# Altium PCB driver_display.PcbDoc
Units mm, origin at the board's own origin, x right, y up, seen from the top; angles counter-clockwise.
Board outline 116 x 42 mm, 2 copper layers (Top Layer, Bottom Layer); 52 components, 65 nets, 197 pads, 48 vias.
Unrouted connection lines stored in the file: 1.
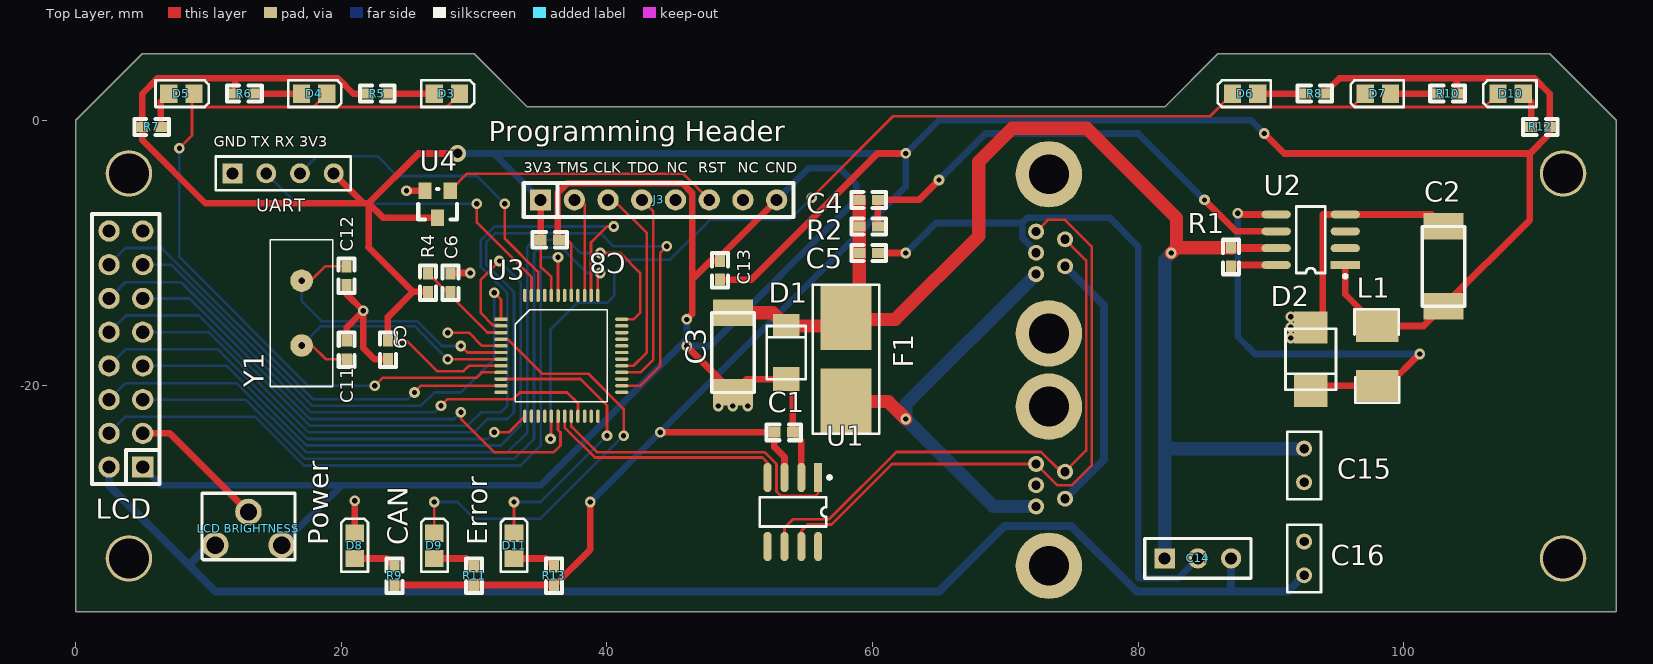
[diagram p0: Top Layer view]
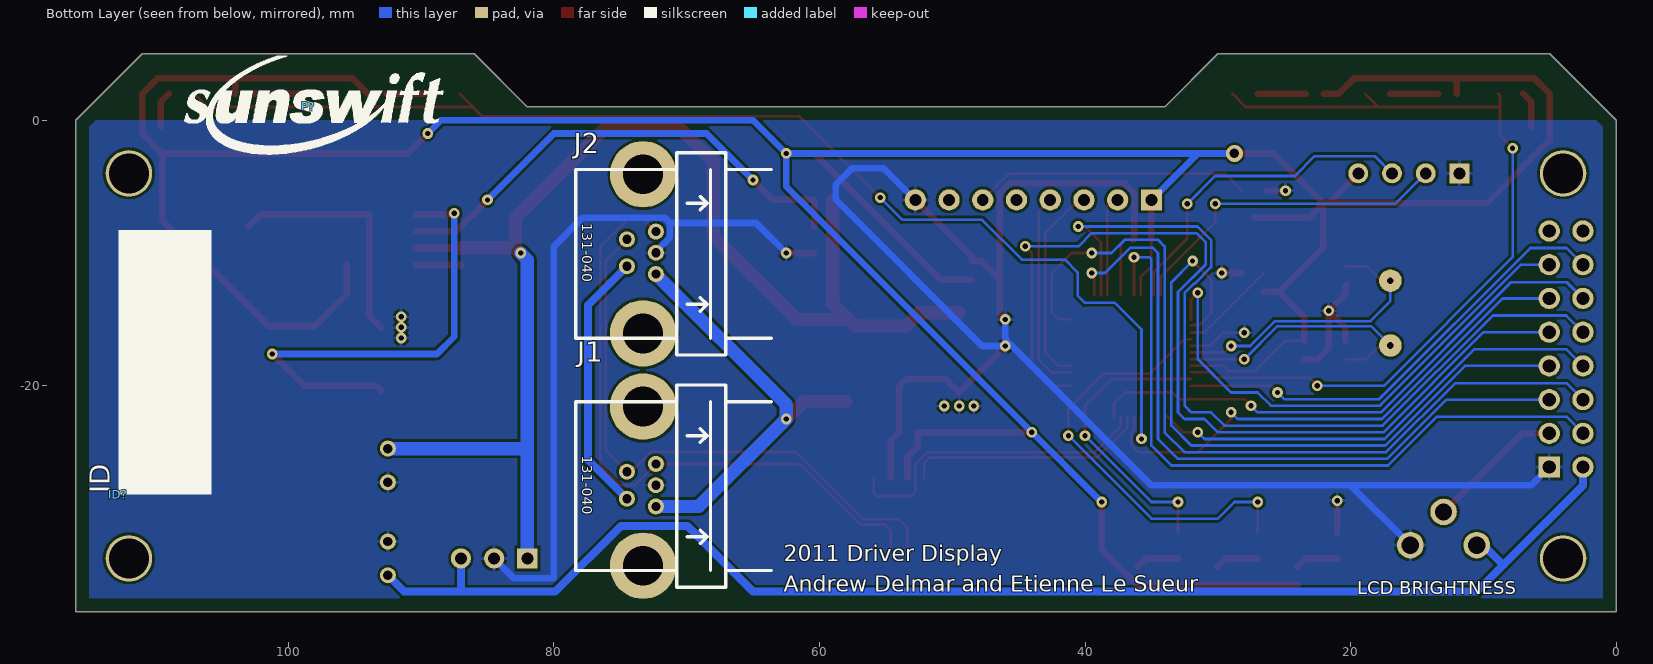
[diagram p1: Bottom Layer view, seen from below]

## Layer stack, top to bottom
Top Layer: signal copper 0.0356
Dielectric: dielectric 0.32, FR-4, Dk 4.8
Bottom Layer: signal copper 0.0356

## Board outline
0,-37 0,0 5,5 30,5 34,1 82,1 86,5 111,5 116,0 116,-37

## Design rules (kind name [scope] priority, off if disabled: settings)
Clearance [All] p1: gap=0.2
PolygonConnect [All] p1: connectstyle=Relief reliefconductorwidth=0.254 reliefentries=4 polygonreliefangle="90 Angle"
RoutingVias [All] p1: holewidth=0.4 width=0.8 viastyle="Through Hole" minholewidth=0.4 minwidth=0.8 maxholewidth=0.4 maxwidth=0.8
SilkscreenOverComponentPads [All] p1: minsilkscreentomaskgap=0.254
SolderMaskExpansion [All] p1: expansion=0.102
Width Width_GND [(InNet('CANGND') OR InNet('GND'))] p1: maxlimit=2 minlimit=0.5 preferedwidth=1 minimp=50.000000 maximp=50.000000 favimp=50.000000
Width Width_5V [(InNet('5V') OR InNet('CAN+5V'))] p2: maxlimit=1 minlimit=0.6 preferedwidth=0.8 minimp=50.000000 maximp=50.000000 favimp=50.000000
Width Width_12V [(InNet('12V') OR InNet('NetF1_1'))] p3: maxlimit=2 minlimit=1 preferedwidth=1 minimp=50.000000 maximp=50.000000 favimp=50.000000
Width Width_3V3 [InNet('3V3')] p4: maxlimit=1 minlimit=0.5 preferedwidth=0.8 minimp=50.000000 maximp=50.000000 favimp=50.000000
Width [All] p5: maxlimit=1 minlimit=0.2 preferedwidth=0.2 minimp=50.000000 maximp=50.000000 favimp=50.000000
27 further rules are at their usual default settings.

## Classes and differential pairs
component class U_3V-Switcher-50mA: C2 C3 C4 C5 D2 L1 R1 R2 U2
component class driver_display: C14 C15 C16 D3 D4 D5 D6 D7 D8 D9 D10 D11 "GND TX RX 3V3" ID? P? R5 R6 R7 R8 R9 R10 R11 R12 R13
component class PWR: C1 D1 F1 "GND TX RX 3V3" J1 U1
component class LPC: C6 C8 C9 C11 C12 C13 J3 R4 U3 U4 U8 Y1
component class LCD: LCD "LCD BRIGHTNESS"

## Components (designator, comment, footprint, x,y, rotation, side; value= is the part's Value field where it differs from the comment)
C1 "100nF" 0603 54,-23.5 r180 top
C2 "4u7 35V" MCCT-CASEC 103,-14 r90 top
C3 "4u7 35V" MCCT-CASEC 49.5,-14.5 r270 top
C4 "1n" 0603 59,-6 r0 top
C5 "100nF" 0603 59,-10 r0 top
C6 "10nF" 0603 28.225,-12.925 r90 top
C8 "100nF" 0603 36.397,-9 r180 top
C9 "100nF" 0603 23.5,-16.6 r270 top
C11 "18pF" 0603 20.4,-18 r90 top
C12 "18pF" 0603 20.375,-11 r270 top
C13 "100nF" 0603 48.5,-12 r90 top
C14 "MC78M05CT" 7805 82,-33 r0 top
C15 "100u" RAD-0.1 92.5,-26 r270 top
C16 "100u" RAD-0.1 92.5,-33 r90 top
D1 "12V Transient Suppressor" SMA 53.5,-17.5 r90 top
D2 "MBRS130" SMB 93,-18 r270 top
D3 "Left Turn LED1" 0805LED12 27,2 r0 top
D4 "Left Turn LED2" 0805LED12 17,2 r0 top
D5 "Left Turn LED3" 0805LED12 7,2 r0 top
D6 "Right Turn LED1" 0805LED12 89,2 r180 top
D7 "Right Turn LED2" 0805LED12 99,2 r180 top
D8 "Power" 0805LED12 21,-33 r90 top
D9 "CAN" 0805LED12 27,-33 r90 top
D10 "Right Turn LED3" 0805LED12 109,2 r180 top
D11 "Error" 0805LED12 33,-33 r90 top
F1 "125mA/3A" LITTELFUSE-154 58,-18 r90 top
"GND TX RX 3V3" "Header 4" HDR1X4 11.8,-4 r0 top (schematic designator J2)
ID? "IDBOX" IDBOX 112.8,-28.2 r90 bottom
J1 "CON5-S" TRIAD5F 74.5,-28.5 r270 bottom
J2 "CON5-S" TRIAD5F 74.5,-11 r270 bottom
J3 "Programming Header" IDC8 35,-6 r0 top
L1 "330uH" 1812 98,-20 r90 top
LCD "LCD" IDC16 5.04,-26.12 r90 top
"LCD BRIGHTNESS" "RPot" trimpot 10.5,-32 r0 top (schematic designator R3)
P? "SUN_LOGO" SUNSWIFTLOGO 98.5,1 r180 bottom
R1 "100k" 0603 87,-11 r90 top
R2 "1R2" 0603 59,-8 r0 top
R4 "10k" 0603 26.525,-11.525 r270 top
R5 "Left Turn 1" 0603 22,2 r0 top
R6 "Left Turn 2" 0603 12,2 r0 top
R7 "Left Turn 3" 0603 5,-0.5 r0 top
R8 "Res3" 0603 94,2 r180 top
R9 "Res3" 0603 24,-35 r90 top
R10 "Res3" 0603 104,2 r180 top
R11 "Res3" 0603 30,-35 r90 top
R12 "Res3" 0603 111,-0.5 r180 top
R13 "Res3" 0603 36,-35 r90 top
U1 "SN65HVD232" SO8 54,-29.5 r180 top
U2 "LTC1474" SO8 93,-9 r90 top
U3 "LPC11C14" QFP48 32,-15 r0 top
U4 "XC61CN2002MR" SOT23-3 28.2,-5.3 r180 top
Y1 "12 MHz" HC49/4H 17,-9 r270 top

## Footprints (in the part's own frame and the unit in brackets; to place one, negate y for a bottom-side part, rotate by r counter-clockwise, add the part's x,y. Pads: shape width x height; smd on the part's side, far side on the other; paste and mask are expansions set on the pad)
0603 [mil]
  rect 35.43x30 smd: 1(0,0) 2(55,0)
  silkscreen extent -24,-24 79,24
0805LED12 [mm]
  rect 1.3x1.4 smd: 1(0,0) 2(1.9,0)
  silkscreen extent -1,-1 3,1
1812 [mm]
  rect 2.4x3.2 smd: 1(0,0) 2(4.5,0)
  silkscreen extent -1.27,-1.66 5.77,1.7
7805 [mil]
  rect 60x60 hole 35.43: 1(0,0)
  round 60 hole 35.43: 2(98.43,0) 3(196.85,0)
  silkscreen extent -59,-59 256,59
HC49/4H [mm]
  round 1.7 hole 0.5: 1(3.085,0) 2(7.965,0)
  silkscreen extent 0,-2.35 11.05,2.35
HDR1X4 [mm] "Connector; Header; 4 Position"
  rect 1.5x1.5 hole 0.9: 1(0,0)
  round 1.5 hole 0.9: 2(2.54,0) 3(5.08,0) 4(7.62,0)
  silkscreen extent -1.27,-1.27 8.89,1.27
IDBOX [mm] "Infobox"
  silkscreen extent 0,-7 19.95,0
IDC8 [mm]
  rect 1.6x1.6 hole 0.9: 1(0,0)
  round 1.6 hole 0.9: 2(2.54,0) 3(5.08,0) 4(7.62,0) 5(10.16,0) 6(12.7,0) 7(15.24,0) 8(17.78,0)
  silkscreen extent -1.27,-1.27 19.05,1.27
IDC16 [mm]
  rect 1.6x1.6 hole 1: 1(0,0)
  round 1.6 hole 1: 2(0,2.54) 3(2.54,0) 4(2.54,2.54) 5(5.08,0) 6(5.08,2.54) 7(7.62,0) 8(7.62,2.54) 9(10.16,0) 10(10.16,2.54) 11(12.7,0) 12(12.7,2.54) 13(15.24,0) 14(15.24,2.54) 15(17.78,0) 16(17.78,2.54)
  silkscreen extent -1.27,-1.27 19.05,3.81
LITTELFUSE-154 [mm]
  rect 5x3.81 smd: 1(-3.185,0) 2(3.185,0)
  silkscreen extent -5.6,-2.51 5.6,2.5
MCCT-CASEC [mm]
  rect 2x3 smd: 1(0,0) 2(6,0)
  silkscreen extent 0,-1.6 6,1.6
QFP48 [mm]
  rect 1x0.26 smd: 1(0.013,0.01)
  oval 1x0.26 smd: 2(0.013,-0.49) 3(0.013,-0.99) 4(0.013,-1.49) 5(0.013,-1.99) 6(0.013,-2.49) 7(0.013,-2.99) 8(0.013,-3.49) 9(0.013,-3.99) 10(0.013,-4.49) 11(0.013,-4.99) 12(0.013,-5.49) 25(9.113,-5.49) 26(9.113,-4.99) 27(9.113,-4.49) 28(9.113,-3.99) 29(9.113,-3.49) 30(9.113,-2.99) 31(9.113,-2.49) 32(9.113,-1.99) 33(9.113,-1.49) 34(9.113,-0.99) 35(9.113,-0.49) 36(9.113,0.01)
  oval 0.26x1 smd: 13(1.813,-7.29) 14(2.313,-7.29) 15(2.813,-7.29) 16(3.313,-7.29) 17(3.813,-7.29) 18(4.313,-7.29) 19(4.813,-7.29) 20(5.313,-7.29) 21(5.813,-7.29) 22(6.313,-7.29) 23(6.813,-7.29) 24(7.313,-7.29) 37(7.313,1.81) 38(6.813,1.81) 39(6.313,1.81) 40(5.813,1.81) 41(5.313,1.81) 42(4.813,1.81) 43(4.313,1.81) 44(3.813,1.81) 45(3.313,1.81) 46(2.813,1.81) 47(2.313,1.81) 48(1.813,1.81)
  silkscreen extent 1.1,-6.2 8.03,0.73
RAD-0.1 [mm] "Radial Cap, Thru-Hole; 2 Leads; 0.1 in Pin Spacing"
  round 1.2 hole 0.7: 1(-1.27,0) 2(1.27,0)
  silkscreen extent -2.54,-1.27 2.54,1.27
SMA [mm]
  rect 1.8x2 smd: A(-2,0) K(2,0)
  silkscreen extent -2,-1.48 2,1.48
SMB [mm]
  rect 2.4x2.5 smd: A(-2.385,0) K(2.385,0)
  silkscreen extent -2.28,-1.9 2.3,1.9
SO8 [mm]
  rect 0.6x2.2 smd: 1(-1.905,-2.6)
  oval 0.6x2.2 smd: 2(-0.635,-2.6) 3(0.635,-2.6) 4(1.905,-2.6) 5(1.905,2.6) 6(0.635,2.6) 7(-0.635,2.6) 8(-1.905,2.6)
  silkscreen extent -2.88,-2.72 2.5,1.1
SOT23-3 [mm]
  rect 1x1.25 smd: 1(0,0) 2(1.905,0) 3(0.965,2.032)
  silkscreen extent -0.51,-0.13 2.41,2.16
SUNSWIFTLOGO [mm] "Sunswift Logo"
  silkscreen extent -9.32,-3.58 10.19,3.81
TRIAD5F [mm]
  round 5 hole 3: 0(-6.934,1.219) 0(5.055,1.219)
  round 1.2 hole 0.7: 1(0,0) 2(0.584,2.184) 3(-1.016,2.184) 4(-2.616,2.184) 5(-2.032,0)
  silkscreen extent -8.56,-3.86 6.68,10.87
trimpot [mm]
  round 2 hole 1.3: 1(0,0) 2(5,0) 3(2.5,2.5)
  silkscreen extent -1,-1.1 6,3.9

## Part data
C1 C4 C5 C6 C8 C9 C11 C12 C13: library part CAP, "Capacitor"
C2 C3: library part "Cap Pol3", "Polarized Capacitor (Surface Mount)"
C14: "3-Terminal Medium-Current Positive Fixed Voltage Regulator"
C15 C16: library part CAP-POL, "Capacitor"
D1: library part DIODE, "Diode"
D2: library part "D SCHOTTKY", "Schottky Diode"
D3 D4 D5 D6 D7 D8 D9 D10 D11: library part LED2, "Typical RED, GREEN, YELLOW, AMBER GaAs LED"
F1: library part FUSE2, "Fuse"
"GND TX RX 3V3": "Header, 4-Pin"
J1 J2: "Connector, 2 pin, with shield @ S"
J3: library part LPCLink_Connector, "LPC SWD Connector"
L1: library part Inductor, "Inductor"
"LCD BRIGHTNESS": "Potentiometer"
R1 R2 R4: library part RES1, "Resistor"
R5 R6 R7: library part Res3, "Resistor"
R8 R9 R10 R11 R12 R13: "Resistor"
U1: "3.3V CAN Transciever"
U2: "Step-down converter"
U3: library part LPC11C14_Full
U4: library part XC61F, "SOT23 reset generator"
Y1: library part CRYSTAL, "Crystal"

## Free pads (board coordinates)
  round 3.5 hole 3: 3(4,-33) 3(4,-4) 3(112,-33) 3(112,-4)

## Via types
v1: diameter 0.8, hole 0.4, Top Layer to Bottom Layer, 47 vias
v2: diameter 1.27, hole 0.711, Top Layer to Bottom Layer, 1 vias

## Nets (pads, with @x,y where several pads share a name; then routed paths per layer and width w, separated by ;. In a path a pad name is that pad's centre, name@x,y a point inside that pad or via, vN(x,y) a via of type N, cw(c..) or ccw(c..) an arc to the next point about the centre after c; other vN are vias at no path point)
3V3: "GND TX RX 3V3.4" C1.2 C2.1 C8.2 C9.1 C13.1 J3.1 L1.2 R4.2 R5.1 R6.1 R7.1 R8.1 R9.1 R10.1 R11.1 R12.1 R13.1 U1.3 U2.1 U3.8 U3.44 U4.3 | length 312.7
  Top Layer w0.2: C9.1 24.9,-16.6 27.2,-18.9 29.2,-18.9 29.61,-18.49 U3.8 ; C8.2 35,-11 35.813,-11.813 U3.44
  Top Layer w0.5: R6.1 12,3.15 ; 19.42,-4 21.67,-6.25 ; R5.1 20.886,2 19.736,3.15 12,3.15 ; C9.1 23.5,-14.822 25.4,-12.922 ; R9.1 R11.1 R13.1 36.07,-35 38.75,-32.32 v1(38.75,-28.75) ; R4.2 25.4,-12.922 ; U4.3 23.132,-7.332 22.05,-6.25 ; v2(28.75,-2.5) 25.8,-2.5 22.05,-6.25 ; C8.2 J3.1 ; v1(44,-23.5) C1.2 52.603,-24.603 53.365,-25.365 U1.3 ; C13.1 50.875,-12 60.375,-2.5 v1(62.5,-2.5) ; v1(89.5,-1) 91,-2.5 109.5,-2.5 ; R8.1 95.15,3.15 104,3.15 ; U2.1 95.6,-13.1 L1.2 101.5,-15.5 C2.1 109.5,-7.5 109.5,-2.5 ; R10.1 104,3.15 ; 12,3.15 6.15,3.15 5,2 R7.1 5,-1.5 9.75,-6.25 21.67,-6.25 ; 21.67,-6.25 22.05,-6.25 ; 22.05,-6.25 22.05,-9.55 22.039,-9.561 25.4,-12.922 ; 104,3.15 109.85,3.15 111,2 R12.1 111,-1 109.5,-2.5
  Bottom Layer w0.5: v2(28.75,-2.5) 31.5,-2.5 ; J3.1 31.5,-2.5 ; v1(38.75,-28.75) v1(44,-23.5) 62.5,-5 v1(62.5,-2.5) ; v1(89.5,-1) 88.5,0 65,0 v1(62.5,-2.5) ; 31.5,-2.5 v1(62.5,-2.5)
5V: "LCD BRIGHTNESS.1" C14.3 C16.1 LCD.2 | length 104.4
  Bottom Layer w0.6: LCD.2 2.5,-27.5 8.5,-33.5 ; 10.5,-32 10,-32 8.5,-33.5 ; C14.3 87,-35.5 ; C16.1 91.27,-35.5 87,-35.5 ; 8.5,-33.5 10.5,-35.5 65,-35.5 69.945,-30.555 74.955,-30.555 79.9,-35.5 87,-35.5
12V: C3.1 C4.1 C5.1 C14.1 C15.1 D1.K F1.2 R1.2 R2.1 U2.7 | length 99.5
  Top Layer w0.6: R1.2@87.032,-9.635 U2.7
  Top Layer w1: C3.1 52.5,-14.5 D1.K 57.315,-15.5 F1.2 ; C4.1 R2.1 C5.1 59,-13.815 F1.2 ; v1(82.5,-10) 82.897,-9.603 ; R1.2@87.032,-9.635 R1.2 82.897,-9.603 ; F1.2 58.185,-15 61.725,-15 68,-8.725 68,-3.125 70.525,-0.6 76.125,-0.6 82.897,-7.372 82.897,-9.603
  Bottom Layer w1: C14.1 82,-24.73 ; v1(82.5,-10) 82,-10.5 82,-24.73 ; C15.1 82,-24.73
/RESET: C6.1 J3.6 R4.1 U3.3 U4.1 | length 28.2
  Top Layer w0.2: R4.1@26.55,-11.55 30.99,-15.99 U3.3 ; U4.1 29.475,-4.025 45.725,-4.025 45.9,-4.2 45.906,-4.2 46.96,-5.254 46.96,-5.26 J3.6
CAN+5V: J1.1 J2.1 | length 19.9
  Bottom Layer w0.6: J1.1 77.425,-25.575 77.425,-13.925 J2.1
CAN_H: J1.4 J2.4 U1.7 | length 48.3
  Top Layer w0.2: U1.7 54.635,-30.915 55.1,-30.45 56.893,-30.45 61.46,-25.884 J1.4 73.932,-27.5 75,-27.5 76.5,-26 76.5,-9.5 74.5,-7.5 73.199,-7.5 J2.4
CAN_L: J1.5 J2.5 U1.6 | length 44.3
  Top Layer w0.2: U1.6 53.365,-30.685 54,-30.05 56.728,-30.05 61.794,-24.984 72.688,-24.984 74.173,-26.468 J1.5 76.081,-24.887 76.081,-10.549 J2.5
CANLED: D9.2 U3.4 | length 33.1
  Top Layer w0.2: D9.2 v1(27,-28.75) ; U3.4 32.491,-16.49 35.091,-19.09 38.59,-19.09 41.25,-21.75 v1(41.25,-23.75)
  Bottom Layer w0.2: v1(27,-28.75) 28.75,-28.75 30,-30 35,-30 v1(41.25,-23.75)
ERRORLED: D11.2 U3.10 | length 22.5
  Top Layer w0.2: U3.10 37.99,-19.49 40,-21.5 v1(40,-23.75) ; D11.2 v1(33,-28.75)
  Bottom Layer w0.2: v1(33,-28.75) 35,-28.75 v1(40,-23.75)
GND: "GND TX RX 3V3.1" "LCD BRIGHTNESS.2" C1.1 C2.2 C3.2 C5.2 C6.2 C8.1 C9.2 C11.2 C12.2 C13.2 C14.2 C15.2 C16.2 D1.A D2.A D8.2 J1.3 J2.3 J3.8 LCD.1 U1.2 U2.4 U3.5 U3.41 U4.2 | length 227.9
  Top Layer w0.2: v1(28,-16) 29.6,-16 30.59,-16.99 U3.5 ; C8.1 37,-9 37.313,-9.313 U3.41
  Top Layer w0.5: C12.2 20.375,-13.075 v1(21.65,-14.35) ; C11.2 20.4,-15.6 v1(21.65,-14.35) ; D8.2 v1(21,-28.65) ; C9.2 22.497,-17.997 21.65,-17.15 v1(21.65,-14.35) ; v1(24.9,-5.3) U4.2 ; C6.2 28.253,-11.5 v1(29.7,-11.5) ; C8.1 36.29,-8.893 36.29,-5.482 37.022,-4.75 45.678,-4.75 46.41,-5.482 46.41,-12 ; v1(46,-17) C3.2 50.5,-19.5 D1.A 54,-20 C1.1 54.635,-24.135 U1.2 ; v1(46,-15) 46.41,-14.59 46.41,-12 ; J3.8 48.5,-10.28 C13.2 47.807,-10.603 46.41,-12 ; C5.2 v1(62.5,-10) ; D2.A 93.905,-14.71 93.905,-7.095 U2.4 102.095,-7.095 C2.2
  Bottom Layer w0.5: LCD.1 6.42,-27.5 20,-27.5 ; 15.5,-32 20,-27.5 ; v1(46,-17) 47.75,-17 58.775,-5.975 58.775,-4.85 57.55,-3.625 55.155,-3.625 J3.8 ; v1(46,-15) 46,-16.5 35,-27.5 20,-27.5 ; v1(62.5,-10) 64.766,-7.734 71.266,-7.734 ; J2.3 72.316,-9.869 71.266,-8.819 71.266,-7.734 ; C14.2 83,-34.5 80,-34.5 80,-9.6 80,-9.5 77.834,-7.334 71.666,-7.334 71.266,-7.734
  other v1: 48.375,-21.525 49.475,-21.525 50.6,-21.525 91.5,-16.4 91.5,-15.6 91.5,-14.8
LEFTLED: D3.2 D4.2 D5.2 U3.9 | length 63.4
  Top Layer w0.2: v1(7.8,-2.1) 8.75,-1.15 8.75,1 ; D5.2 8.75,1.85 8.75,1 ; D4.2 17.9,1 ; v1(22.5,-20) 23.1,-19.4 30.166,-19.4 30.576,-18.99 U3.9 ; D3.2 27.9,1 17.9,1 ; 8.75,1 17.9,1
  Bottom Layer w0.2: v1(7.8,-2.1) 7.8,-10.3 17.5,-20 v1(22.5,-20)
NetC4_2: C4.2 R2.2 U2.6 | length 37.1
  Top Layer w0.5: R2.2 C4.2 63.5,-6 v1(65,-4.5) ; v1(85,-6) 87.365,-8.365 U2.6
  Bottom Layer w0.5: v1(65,-4.5) 68.5,-1 80,-1 v1(85,-6)
NetD2_K: D2.K L1.1 U2.5 | length 35.8
  Top Layer w0.5: v1@87.5,-7.095 U2.5 ; D2.K 93.385,-20 L1.1 98.8,-20 v1(101.2,-17.6)
  Bottom Layer w0.5: v1(87.5,-7) 87.5,-16.3 88.8,-17.6 v1(101.2,-17.6)
NetD3_1: D3.1 R5.2 | length 3.6
  Top Layer w0.5: R5.2 D3.1
NetD4_1: D4.1 R6.2 | length 3.6
  Top Layer w0.5: R6.2 D4.1
NetD5_1: D5.1 R7.2 | length 2.7
  Top Layer w0.5: R7.2 6.397,1.397 D5.1
NetD6_1: D6.1 R8.2 | length 3.6
  Top Layer w0.5: D6.1 R8.2
NetD7_1: D7.1 R10.2 | length 3.6
  Top Layer w0.5: D7.1 R10.2
NetD8_1: D8.1 R9.2 | length 3.2
  Top Layer w0.5: D8.1 23.397,-33 R9.2
NetD9_1: D9.1 R11.2 | length 3.2
  Top Layer w0.5: D9.1 29.397,-33 R11.2
NetD10_1: D10.1 R12.2 | length 2.7
  Top Layer w0.5: D10.1 109.603,1.397 R12.2
NetD11_1: D11.1 R13.2 | length 3.2
  Top Layer w0.5: D11.1 35.397,-33 R13.2
NetF1_1: F1.1 J1.2 J2.2 | length 32.6
  Top Layer w1: F1.1 61.185,-21.185 v1(62.5,-22.5)
  Bottom Layer w1: J1.2 69.084,-29.084 v1(62.5,-22.5) 62.5,-21.4 J2.2
NetLCD_3: "LCD BRIGHTNESS.3" LCD.3 | length 10.4
  Top Layer w0.5: LCD.3 7.08,-23.58 13,-29.5
NetLCD_4: LCD.4 U3.43 | length 53.4
  Top Layer w0.2: U3.43 v1(36.313,-10.313)
  Bottom Layer w0.2: LCD.4 3.755,-22.325 13.5,-22.325 17.175,-26 33.5,-26 35,-24.5 35,-10.5 35.187,-10.313 v1(36.313,-10.313)
NetLCD_5: LCD.5 U3.37 | length 53.6
  Top Layer w0.2: U3.37 39.313,-11.687 v1(39.5,-11.5)
  Bottom Layer w0.2: LCD.5 12.79,-21.04 17.25,-25.5 33,-25.5 34.5,-24 34.5,-10 34.887,-9.613 36.603,-9.613 38.49,-11.5 v1(39.5,-11.5)
NetLCD_6: LCD.6 U3.36 | length 63.1
  Top Layer w0.2: v1(39.5,-10) 41,-10 42.5,-11.5 42.5,-14.5 42.01,-14.99 U3.36
  Bottom Layer w0.2: LCD.6 3.74,-19.8 12.116,-19.8 17.316,-25 32.5,-25 34,-23.5 34,-9.5 34.5,-9 37,-9 38,-10 v1(39.5,-10)
NetLCD_7: LCD.7 U3.2 | length 51.1
  Top Layer w0.2: v1(31.9,-10.6) 30.5,-12 30.5,-14.531 31.388,-15.42 31.943,-15.42 U3.2
  Bottom Layer w0.2: LCD.7 11.381,-18.5 17.381,-24.5 32,-24.5 33.5,-23 33.5,-12.2 v1(31.9,-10.6)
NetLCD_8: LCD.8 U3.13 | length 35.3
  Top Layer w0.2: v1(31.5,-23.5) 32.602,-23.5 U3.13
  Bottom Layer w0.2: LCD.8 3.75,-17.25 10.697,-17.25 17.447,-24 31,-24 v1(31.5,-23.5)
NetLCD_9: LCD.9 U3.26 | length 72.4
  Top Layer w0.2: U3.26 42.51,-19.99 44,-18.5 44,-10 v1(44.5,-9.5)
  Bottom Layer w0.2: LCD.9 9.973,-15.96 17.513,-23.5 30,-23.5 31,-22.5 32.5,-22.5 33,-22 33,-12.944 30.9,-10.844 30.9,-9.2 31.6,-8.5 39.5,-8.5 40.5,-9.5 v1(44.5,-9.5)
NetLCD_10: LCD.10 U3.38 | length 64.5
  Top Layer w0.2: U3.38 38.8,-13.177 38.8,-9.2 40,-8 v1(40.5,-8)
  Bottom Layer w0.2: LCD.10 3.76,-14.7 9.278,-14.7 17.578,-23 29.5,-23 30.5,-22 32,-22 32.5,-21.5 32.5,-13.01 31.79,-12.3 31.734,-12.3 30.5,-11.066 30.5,-9.034 31.534,-8 v1(40.5,-8)
NetLCD_11: LCD.11 U3.18 | length 39.5
  Top Layer w0.2: v1(29,-22) 29,-22.5 31.5,-25 36,-25 36.5,-24.5 36.5,-23.5 36.313,-23.313 U3.18
  Bottom Layer w0.2: LCD.11 8.564,-13.42 17.644,-22.5 28.5,-22.5 v1(29,-22)
NetLCD_12: LCD.12 U3.21 | length 41.8
  Top Layer w0.2: v1(27.5,-21.5) 28,-21 32.934,-21 33.434,-20.5 37,-20.5 37.813,-21.313 U3.21
  Bottom Layer w0.2: LCD.12 3.72,-12.2 7.91,-12.2 17.71,-22 27,-22 v1(27.5,-21.5)
NetLCD_13: LCD.13 U3.1 | length 39.5
  Top Layer w0.2: v1(31.5,-13) 32.013,-13.513 U3.1 U3.1@32.013,-15.013
  Bottom Layer w0.2: LCD.13 7.155,-10.88 17.775,-21.5 26,-21.5 27,-20.5 29,-20.5 31.5,-18 v1(31.5,-13)
NetLCD_14: LCD.14 U3.11 | length 35.2
  Top Layer w0.2: v1(25.5,-20.5) 26.01,-19.99 U3.11
  Bottom Layer w0.2: LCD.14 3.755,-9.625 6.466,-9.625 17.841,-21 25,-21 v1(25.5,-20.5)
NetR1_1: R1.1 U2.8 | length 3.5
  Top Layer w0.5: R1.1 87,-10.905 U2.8
NetU1_1: U1.1 U3.20 | length 24
  Top Layer w0.2: U3.20 37.313,-23.063 39.25,-25 51.866,-25 52.765,-25.899 52.765,-27.949 53.116,-28.3 55.7,-28.3 55.905,-28.095 U1.1
NetU1_4: U1.4 U3.19 | length 18.3
  Top Layer w0.2: U3.19 36.813,-23.128 39.084,-25.4 51.7,-25.4 52.095,-25.795 U1.4
NetU3_12: U3.12
NetU3_14: U3.14
NetU3_15: U3.15
NetU3_16: U3.16
NetU3_22: U3.22
NetU3_23: U3.23
NetU3_24: U3.24
NetU3_25: U3.25
NetU3_27: U3.27
NetU3_30: U3.30
NetU3_31: U3.31
NetU3_32: U3.32
NetU3_33: U3.33
NetU3_34: U3.34
NetU3_35: U3.35
NetU3_40: U3.40
NetU3_42: U3.42
NetU3_45: U3.45
NetU3_48: U3.48
RIGHTLED: D6.2 D7.2 D10.2 U3.17 | length 92.5
  Top Layer w0.2: v1(35.75,-24) 35.813,-23.937 U3.17 ; v1(55.425,-5.825) 61.55,0.3 85.4,0.3 D6.2 ; 86.1,1 96.1,1 ; D7.2 96.1,1 ; D10.2 106.1,1 96.1,1
  Bottom Layer w0.2: v1(35.75,-24) 35.75,-15.75 37.75,-13.75 40,-13.75 40.55,-13.2 40.55,-11.45 41.5,-10.5 44.75,-10.5 47.75,-7.5 53.75,-7.5 v1(55.425,-5.825)
TCLK: J3.3 U3.29 | length 15.3
  Top Layer w0.2: J3.3 40.5,-6 43,-8.5 43,-17.5 42.01,-18.49 U3.29
TDO: J3.4 U3.28 | length 15.2
  Top Layer w0.2: U3.28 42.51,-18.99 43.49,-18.01 43.49,-6.87 J3.4
TMS: J3.2 U3.39 | length 7.8
  Top Layer w0.2: J3.2 38,-6 38.313,-6.313 U3.39
UART_RX: "GND TX RX 3V3.3" U3.46 | length 25.4
  Top Layer w0.2: v1(32.3,-6.3) 32.3,-8.9 34.813,-11.413 U3.46
  Bottom Layer w0.2: 16.88,-4 18.18,-2.7 22.7,-2.7 24.2,-4.2 30.2,-4.2 v1(32.3,-6.3)
UART_TX: "GND TX RX 3V3.2" U3.47 | length 25.4
  Top Layer w0.2: v1(30.2,-6.3) 30.2,-7.7 34.313,-11.813 U3.47
  Bottom Layer w0.2: 14.34,-4 16.64,-6.3 v1(30.2,-6.3)
XTALIN: C12.1 U3.6 Y1.1 | length 22.7
  Top Layer w0.2: Y1.1@16.5,-11.585 Y1.1 17.69,-12.085 18.775,-11 C12.1 ; v1(29,-17) 29.49,-17.49 U3.6
  Bottom Layer w0.2: Y1.1 17,-13.625 18.5,-15.125 25.691,-15.125 27.566,-17 v1(29,-17)
XTALOUT: C11.1 U3.7 Y1.2 | length 21.2
  Top Layer w0.2: Y1.2@16.5,-17.465 Y1.2 17.79,-16.965 18.825,-18 C11.1 ; v1(28,-18) 28.01,-17.99 U3.7
  Bottom Layer w0.2: Y1.2 18.44,-15.525 25.525,-15.525 v1(28,-18)
pads on no net: J1.0 J2.0 J3.5 J3.7 LCD.15 LCD.16 U1.5 U1.8 U2.2 U2.3

## Polygon pours and split planes (outlines as drawn)
GND on Bottom Layer "Mechanical 1-No Net" (solid, remove dead copper, pour order 2): 1,-36 1,-0.5 1.5,0 114.5,0 115,-0.5 115,-36

## Silkscreen, mask and mechanical layers (free items; w line width, h text height)
Top Overlay:
  text "3V3" at 33.748,-3.956 h0.8
  text "TMS" at 36.288,-3.956 h0.8
  text "CLK" at 38.981,-3.956 h0.8
  text "TDO" at 41.571,-3.956 h0.8
  text "NC" at 44.492,-3.956 h0.8
  text "RST" at 46.855,-3.956 h0.8
  text "NC" at 49.852,-3.956 h0.8
  text "CND" at 51.909,-3.956 h0.8
  text "UART" at 13.6,-6.9 h1
Bottom Overlay:
  text "2011 Driver Display" at 62.7,-33.2 h1.2
  text "Andrew Delmar and Etienne Le Sueur" at 62.7,-35.5 h1.2
Mechanical 1:
  the board outline again, w0.254

## Text inside footprints (layer, text, board x,y; h text height)
ID?: Bottom Overlay "ID" at 113.45,-28.1 h1.52 r270
J1: Bottom Overlay "131-040" at 77.853,-25.274 h0.76 r90
J2: Bottom Overlay "131-040" at 77.853,-7.774 h0.76 r90